# EAGLE board CT_schematic (EAGLE 7.6.0)

Size 100 x 80 mm. Coordinates in mm from the lower left corner, seen from the top.
Outline: 0,0 100,0 100,80 0,80 0,0
Copper layers (1*16): Top 0.035mm / dielectric 1.5mm / Bottom 0.035mm
Design rules "default": minimum track width 10mil, minimum drill 24mil, track to track 8mil, track to pad 8mil, pad to pad 8mil, via to via 8mil, smd to smd 8mil, copper to edge 40mil, drill to drill 8mil, minimum pad ring 10mil, minimum via ring 8mil, stop-mask expansion 4mil, vias tented up to drill 0mil, thermal gap 10mil

## Footprints (pad centres in the part's own frame; a part is rotated, then mirrored left to right if it is on the bottom)
C0603 = smd 0.8 x 0.8: 1 -0.762,0; 2 0.762,0
C0402 = smd 0.5 x 0.5: 1 -0.508,0; 2 0.508,0
C1210 = smd 1.2 x 2.5: 1 -1.524,0; 2 1.524,0
C0805 = smd 1.2 x 1.3: 1 -1.016,0; 2 1.016,0
C1206 = smd 1.3 x 1.6: 1 -1.524,0; 2 1.524,0
EXV-9H = smd 3.505 x 1.676: 1 -2.857,0; 2 2.857,0
PJ-037B_PACKAGE = drill 3.7 square: 1 12,0 | drill 3.2 square: 2 6,0
R0603 = smd 0.8 x 0.8: 1 -0.762,0; 2 0.762,0
LQFP100 = smd 0.3 x 1.2: 1 -6,-7.75; 2 -5.5,-7.75; 3 -5,-7.75; 4 -4.5,-7.75; 5 -4,-7.75; 6 -3.5,-7.75; 7 -3,-7.75; 8 -2.5,-7.75; 9 -2,-7.75; 10 -1.5,-7.75; 11 -1,-7.75; 12 -0.5,-7.75; 13 0,-7.75; 14 0.5,-7.75; 15 1,-7.75; 16 1.5,-7.75; 17 2,-7.75; 18 2.5,-7.75; 19 3,-7.75; 20 3.5,-7.75; 21 4,-7.75; 22 4.5,-7.75; 23 5,-7.75; 24 5.5,-7.75; 25 6,-7.75; 51 6,7.75; 52 5.5,7.75; 53 5,7.75; 54 4.5,7.75; 55 4,7.75; 56 3.5,7.75; 57 3,7.75; 58 2.5,7.75; 59 2,7.75; 60 1.5,7.75; 61 1,7.75; 62 0.5,7.75; 63 0,7.75; 64 -0.5,7.75; 65 -1,7.75; 66 -1.5,7.75; 67 -2,7.75; 68 -2.5,7.75; 69 -3,7.75; 70 -3.5,7.75; 71 -4,7.75; 72 -4.5,7.75; 73 -5,7.75; 74 -5.5,7.75; 75 -6,7.75 | smd 1.2 x 0.3: 26 7.75,-6; 27 7.75,-5.5; 28 7.75,-5; 29 7.75,-4.5; 30 7.75,-4; 31 7.75,-3.5; 32 7.75,-3; 33 7.75,-2.5; 34 7.75,-2; 35 7.75,-1.5; 36 7.75,-1; 37 7.75,-0.5; 38 7.75,0; 39 7.75,0.5; 40 7.75,1; 41 7.75,1.5; 42 7.75,2; 43 7.75,2.5; 44 7.75,3; 45 7.75,3.5; 46 7.75,4; 47 7.75,4.5; 48 7.75,5; 49 7.75,5.5; 50 7.75,6; 76 -7.75,6; 77 -7.75,5.5; 78 -7.75,5; 79 -7.75,4.5; 80 -7.75,4; 81 -7.75,3.5; 82 -7.75,3; 83 -7.75,2.5; 84 -7.75,2; 85 -7.75,1.5; 86 -7.75,1; 87 -7.75,0.5; 88 -7.75,0; 89 -7.75,-0.5; 90 -7.75,-1; 91 -7.75,-1.5; 92 -7.75,-2; 93 -7.75,-2.5; 94 -7.75,-3; 95 -7.75,-3.5; 96 -7.75,-4; 97 -7.75,-4.5; 98 -7.75,-5; 99 -7.75,-5.5; 100 -7.75,-6
TDFN-8/6MM = smd 0.3 x 0.75: 1 0,0; 2 0.5,0; 3 1,0; 4 1.5,0; 5 1.5,3; 6 1,3; 7 0.5,3; 8 0,3
TFBGA-153 = smd 0.3 x 0.3: A1 -3.25,3.25; A2 -2.75,3.25; A3 -2.25,3.25; A4 -1.75,3.25; A5 -1.25,3.25; A6 -0.75,3.25; A7 -0.25,3.25; A8 0.25,3.25; A9 0.75,3.25; A10 1.25,3.25; A11 1.75,3.25; A12 2.25,3.25; A13 2.75,3.25; A14 3.25,3.25; B1 -3.25,2.75; B2 -2.75,2.75; B3 -2.25,2.75; B4 -1.75,2.75; B5 -1.25,2.75; B6 -0.75,2.75; B7 -0.25,2.75; B8 0.25,2.75; B9 0.75,2.75; B10 1.25,2.75; B11 1.75,2.75; B12 2.25,2.75; B13 2.75,2.75; B14 3.25,2.75; C1 -3.25,2.25; C2 -2.75,2.25; C3 -2.25,2.25; C4 -1.75,2.25; C5 -1.25,2.25; C6 -0.75,2.25; C7 -0.25,2.25; C8 0.25,2.25; C9 0.75,2.25; C10 1.25,2.25; C11 1.75,2.25; C12 2.25,2.25; C13 2.75,2.25; C14 3.25,2.25; D1 -3.25,1.75; D2 -2.75,1.75; D3 -2.25,1.75; D4 -1.75,1.75; D12 2.25,1.75; D13 2.75,1.75; D14 3.25,1.75; E1 -3.25,1.25; E2 -2.75,1.25; E3 -2.25,1.25; E5 -1.25,1.25; E6 -0.75,1.25; E7 -0.25,1.25; E8 0.25,1.25; E9 0.75,1.25; E10 1.25,1.25; E12 2.25,1.25; E13 2.75,1.25; E14 3.25,1.25; F1 -3.25,0.75; F2 -2.75,0.75; F3 -2.25,0.75; F5 -1.25,0.75; F10 1.25,0.75; F12 2.25,0.75; F13 2.75,0.75; F14 3.25,0.75; G1 -3.25,0.25; G2 -2.75,0.25; G3 -2.25,0.25; G5 -1.25,0.25; G10 1.25,0.25; G12 2.25,0.25; G13 2.75,0.25; G14 3.25,0.25; H1 -3.25,-0.25; H2 -2.75,-0.25; H3 -2.25,-0.25; H5 -1.25,-0.25; H10 1.25,-0.25; H12 2.25,-0.25; H13 2.75,-0.25; H14 3.25,-0.25; J1 -3.25,-0.75; J2 -2.75,-0.75; J3 -2.25,-0.75; J5 -1.25,-0.75; J10 1.25,-0.75; J12 2.25,-0.75; J13 2.75,-0.75; J14 3.25,-0.75; K1 -3.25,-1.25; K2 -2.75,-1.25; K3 -2.25,-1.25; K5 -1.25,-1.25; K6 -0.75,-1.25; K7 -0.25,-1.25; K8 0.25,-1.25; K9 0.75,-1.25; K10 1.25,-1.25; K12 2.25,-1.25; K13 2.75,-1.25; K14 3.25,-1.25; L1 -3.25,-1.75; L2 -2.75,-1.75; L3 -2.25,-1.75; L12 2.25,-1.75; L13 2.75,-1.75; L14 3.25,-1.75; M1 -3.25,-2.25; M2 -2.75,-2.25; M3 -2.25,-2.25; M4 -1.75,-2.25; M5 -1.25,-2.25; M6 -0.75,-2.25; M7 -0.25,-2.25; M8 0.25,-2.25; M9 0.75,-2.25; M10 1.25,-2.25; M11 1.75,-2.25; M12 2.25,-2.25; M13 2.75,-2.25; M14 3.25,-2.25; N1 -3.25,-2.75; N2 -2.75,-2.75; N3 -2.25,-2.75; N4 -1.75,-2.75; N5 -1.25,-2.75; N6 -0.75,-2.75; N7 -0.25,-2.75; N8 0.25,-2.75; N9 0.75,-2.75; N10 1.25,-2.75; N11 1.75,-2.75; N12 2.25,-2.75; N13 2.75,-2.75; N14 3.25,-2.75; P1 -3.25,-3.25; P2 -2.75,-3.25; P3 -2.25,-3.25; P4 -1.75,-3.25; P5 -1.25,-3.25; P6 -0.75,-3.25; P7 -0.25,-3.25; P8 0.25,-3.25; P9 0.75,-3.25; P10 1.25,-3.25; P11 1.75,-3.25; P12 2.25,-3.25; P13 2.75,-3.25; P14 3.25,-3.25
SOIC-8 = smd 1.6 x 0.6: 1 -2.7,1.905 | smd 1.55 x 0.6: 2 -2.7,0.635; 3 -2.7,-0.635; 4 -2.7,-1.905; 5 2.7,-1.905; 6 2.7,-0.635; 7 2.7,0.635; 8 2.7,1.905
182-009-MALE = drill 1.194 pad 1.524 octagon: 1 -5.537,10.923; 2 -2.769,10.923; 3 0,10.923; 4 2.769,10.923; 5 5.537,10.923; 6 -4.153,8.08; 7 -1.384,8.08; 8 1.384,8.08; 9 4.153,8.08 | hole 3.048: -12.446,9.501; 12.446,9.501
WFDN-8 = smd 0.48 x 0.7: 1 0,0; 2 1.27,0; 3 2.54,0; 4 3.81,0; 5 3.81,4.45; 6 2.54,4.45; 7 1.27,4.45; 8 0,4.45 | smd 4 x 3: 9 1.89,2.25
SSOP-28 = smd 1.5 x 0.4: 1 -3.625,4.225; 2 -3.625,3.575; 3 -3.625,2.925; 4 -3.625,2.275; 5 -3.625,1.625; 6 -3.625,0.975; 7 -3.625,0.325; 8 -3.625,-0.325; 9 -3.625,-0.975; 10 -3.625,-1.625; 11 -3.625,-2.275; 12 -3.625,-2.925; 13 -3.625,-3.575; 14 -3.625,-4.225; 15 3.625,-4.225; 16 3.625,-3.575; 17 3.625,-2.925; 18 3.625,-2.275; 19 3.625,-1.625; 20 3.625,-0.975; 21 3.625,-0.325; 22 3.625,0.325; 23 3.625,0.975; 24 3.625,1.625; 25 3.625,2.275; 26 3.625,2.925; 27 3.625,3.575; 28 3.625,4.225
HTSS-105-01-G-D = drill 1 pad 1.8 square: 1 0,0 | drill 1 pad 1.8: 2 0,2.54; 3 2.54,0; 4 2.54,2.54; 5 5.08,0; 6 5.08,2.54; 7 7.62,0; 8 7.62,2.54; 9 10.16,0; 10 10.16,2.54
QFN-28 = smd 0.813 x 0.305: 1 -2.451,1.5; 2 -2.451,1; 3 -2.451,0.5; 4 -2.451,0; 5 -2.451,-0.5; 6 -2.451,-1; 7 -2.451,-1.5; 15 2.451,-1.5; 16 2.451,-1; 17 2.451,-0.5; 18 2.451,0; 19 2.451,0.5; 20 2.451,1; 21 2.451,1.5 | smd 0.305 x 0.813: 8 -1.5,-2.451; 9 -1,-2.451; 10 -0.5,-2.451; 11 0,-2.451; 12 0.5,-2.451; 13 1,-2.451; 14 1.5,-2.451; 22 1.5,2.451; 23 1,2.451; 24 0.5,2.451; 25 0,2.451; 26 -0.5,2.451; 27 -1,2.451; 28 -1.5,2.451 | smd 3.607 x 3.607: 29 0,0
SJ-43515TS-SMT-TR = smd 2.2 x 3: 1 0.6,-7.4; 4 3.4,-7.4 | smd 3 x 3: 2 12.8,-7.4; 5 17,-3 | smd 2 x 3: 3 5.3,0; 6 2.5,0 | drill 1.8: P$7 4.5,-3.69; P$8 11.54,-3.69
ABS07-32.768KHZ-7-T = smd 1.1 x 2.4: 1 -2.5,0; 2 0,0
ABLS-25.000MHZ-B2F-T = smd 5.6 x 2.8: 1 -3.81,0; 2 5.69,0
ABLS-12.288MHZ-B4-T = smd 5.6 x 2.8: 1 -3.81,0; 2 5.69,0
WSON-8 = smd 0.3 x 0.6: 1 -0.75,0; 2 0.05,0; 3 0.85,0; 4 1.65,0; 5 1.65,3.8; 6 0.85,3.8; 7 0.05,3.8; 8 -0.75,3.8 | smd 3 x 2.6: PAD 0.45,1.9
SON-6 = smd 0.55 x 0.3: 1 -0.355,0.5 | smd 0.52 x 0.3: 2 -0.37,0; 3 -0.37,-0.5; 4 0.37,-0.5; 5 0.37,0; 6 0.37,0.5
SW_4-1437565-2 = smd 1.4 x 2.1: 1 -2.23,4.55; 2 -2.23,-4.55; 3 2.23,4.55; 4 2.23,-4.55
LGM67K-G1J2-24-Z = smd 0.8 x 1.4: A -2,0; C 0,0
NC7SZ125M5X = smd 1.3 x 0.7: 1 -1.3,0.95; 2 -1.3,0; 3 -1.3,-0.95; 4 1.3,-0.95; 5 1.3,0.95

## Placement (x,y rotation side)
C1  1e-06  [C0603]  -69.85,85.09 0 top  (outside the outline)
C2  1e-07  [C0603]  -73.66,85.09 0 top  (outside the outline)
C3  1e-07  [C0603]  -77.47,85.09 0 top  (outside the outline)
C4  1e-07  [C0603]  -81.28,85.09 0 top  (outside the outline)
C5  1e-07  [C0603]  -85.09,85.09 0 top  (outside the outline)
C6  1e-07  [C0603]  -88.9,85.09 0 top  (outside the outline)
C7  1e-07  [C0603]  -15.24,90.17 0 top  (outside the outline)
C8  4.7e-06  [C0603]  -54.61,85.09 0 top  (outside the outline)
C9  1e-08  [C0603]  -19.05,90.17 0 top  (outside the outline)
C10  1e-06  [C0603]  -22.86,90.17 0 top  (outside the outline)
C11  1e-11  [C0402]  -73.66,90.17 0 top  (outside the outline)
C12  1e-11  [C0402]  -77.47,90.17 0 top  (outside the outline)
C13  1e-11  [C0402]  -81.28,90.17 0 top  (outside the outline)
C14  1e-11  [C0402]  -85.09,90.17 0 top  (outside the outline)
C15  1e-08  [C0402]  -88.9,90.17 0 top  (outside the outline)
C16  1e-07  [C0402]  -15.24,95.25 0 top  (outside the outline)
C17  2.2e-06  [C0603]  -58.42,85.09 0 top  (outside the outline)
C18  2.2e-06  [C0603]  -62.23,85.09 0 top  (outside the outline)
C19  1e-07  [C0402]  -19.05,95.25 0 top  (outside the outline)
C20  1e-07  [C0402]  -22.86,95.25 0 top  (outside the outline)
C21  2.2e-06  [C0603]  -66.04,85.09 0 top  (outside the outline)
C22  1e-07  [C0402]  -26.67,95.25 0 top  (outside the outline)
C23  1e-07  [C0402]  -30.48,95.25 0 top  (outside the outline)
C24  1e-07  [C0402]  -34.29,95.25 0 top  (outside the outline)
C25  1e-07  [C0402]  -38.1,95.25 0 top  (outside the outline)
C26  1e-07  [C0402]  -41.91,95.25 0 top  (outside the outline)
C27  1e-07  [C0402]  -45.72,95.25 0 top  (outside the outline)
C28  1e-07  [C0402]  -49.53,95.25 0 top  (outside the outline)
C29  2.2e-05  [C1210]  -24.13,73.66 0 top  (outside the outline)
C30  2.2e-05  [C1210]  -30.48,73.66 0 top  (outside the outline)
C31  1e-09  [C0402]  -53.34,95.25 0 top  (outside the outline)
C32  1e-09  [C0402]  -57.15,95.25 0 top  (outside the outline)
C33  1e-07  [C0402]  -60.96,95.25 0 top  (outside the outline)
C34  1e-07  [C0402]  -64.77,95.25 0 top  (outside the outline)
C35  1e-07  [C0402]  -68.58,95.25 0 top  (outside the outline)
C36  1e-07  [C0402]  -72.39,95.25 0 top  (outside the outline)
C37  1e-07  [C0402]  -76.2,95.25 0 top  (outside the outline)
C38  1e-05  [C0805]  -60.96,73.66 0 top  (outside the outline)
C39  1e-05  [C0805]  -66.04,73.66 0 top  (outside the outline)
C40  1e-05  [C0805]  -71.12,73.66 0 top  (outside the outline)
C41  1e-05  [C0805]  -76.2,73.66 0 top  (outside the outline)
C42  1e-05  [C0805]  -81.28,73.66 0 top  (outside the outline)
C43  2.2e-11  [C0402]  -66.04,90.17 0 top  (outside the outline)
C44  2.2e-11  [C0402]  -69.85,90.17 0 top  (outside the outline)
C45  1e-08  [C0402]  -80.01,95.25 0 top  (outside the outline)
C46  1e-05  [C1206]  -43.18,73.66 0 top  (outside the outline)
C47  1e-05  [C1210]  -36.83,73.66 0 top  (outside the outline)
C48  1e-07  [C0402]  -83.82,95.25 0 top  (outside the outline)
C49  0.0001  [EXV-9H]  -66.04,57.15 0 top  (outside the outline)
C50  0.0001  [EXV-9H]  -77.47,57.15 0 top  (outside the outline)
C51  1e-08  [C0402]  -87.63,95.25 0 top  (outside the outline)
C52  1e-08  [C0402]  -15.24,100.33 0 top  (outside the outline)
J1  PJ-037B  [PJ-037B_PACKAGE]  -27.94,45.72 0 top  (outside the outline)
R2  1000.0  [R0603]  -26.67,90.17 0 top  (outside the outline)
R4  4700.0  [R0603]  -30.48,90.17 0 top  (outside the outline)
R5  4700.0  [R0603]  -34.29,90.17 0 top  (outside the outline)
R6  2200.0  [R0603]  -38.1,90.17 0 top  (outside the outline)
R7  2200.0  [R0603]  -41.91,90.17 0 top  (outside the outline)
R8  10000.0  [R0603]  -50.8,80.01 0 top  (outside the outline)
R9  34000.0  [R0603]  -55.88,80.01 0 top  (outside the outline)
R10  34000.0  [R0603]  -60.96,80.01 0 top  (outside the outline)
R11  34000.0  [R0603]  -66.04,80.01 0 top  (outside the outline)
R12  34000.0  [R0603]  -71.12,80.01 0 top  (outside the outline)
R13  34000.0  [R0603]  -76.2,80.01 0 top  (outside the outline)
R14  34000.0  [R0603]  -81.28,80.01 0 top  (outside the outline)
R15  34000.0  [R0603]  -86.36,80.01 0 top  (outside the outline)
R16  34000.0  [R0603]  -15.24,85.09 0 top  (outside the outline)
R17  34000.0  [R0603]  -20.32,85.09 0 top  (outside the outline)
R18  34000.0  [R0603]  -25.4,85.09 0 top  (outside the outline)
R19  120.0  [R0603]  -45.72,90.17 0 top  (outside the outline)
R20  100000.0  [R0603]  -86.36,73.66 0 top  (outside the outline)
R21  100000.0  [R0603]  -15.24,80.01 0 top  (outside the outline)
R22  100000.0  [R0603]  -20.32,80.01 0 top  (outside the outline)
R23  100000.0  [R0603]  -25.4,80.01 0 top  (outside the outline)
R24  100000.0  [R0603]  -30.48,80.01 0 top  (outside the outline)
R25  47000.0  [R0603]  -30.48,85.09 0 top  (outside the outline)
R26  47000.0  [R0603]  -35.56,85.09 0 top  (outside the outline)
R27  47000.0  [R0603]  -40.64,85.09 0 top  (outside the outline)
R28  680.0  [R0603]  -49.53,90.17 0 top  (outside the outline)
R29  100000.0  [R0603]  -35.56,80.01 0 top  (outside the outline)
R30  2231.0  [R0603]  -53.34,90.17 0 top  (outside the outline)
R31  1000.0  [R0603]  -57.15,90.17 0 top  (outside the outline)
R32  10000.0  [R0603]  -45.72,85.09 0 top  (outside the outline)
R33  10000.0  [R0603]  -50.8,85.09 0 top  (outside the outline)
R34  9100.0  [R0603]  -60.96,90.17 0 top  (outside the outline)
R35  680000.0  [R0603]  -40.64,80.01 0 top  (outside the outline)
R36  120000.0  [R0603]  -45.72,80.01 0 top  (outside the outline)
U1  STM32L471VET6  [LQFP100]  -77.47,8.89 0 top  (outside the outline)
U2  24AA00T-I/MNY  [TDFN-8/6MM]  -24.13,57.15 0 top  (outside the outline)
U3  mtfc4gmcdm  [TFBGA-153]  -59.69,8.89 0 top  (outside the outline)
U4  SN65HVD230D  [SOIC-8]  -36.83,57.15 0 top  (outside the outline)
U5  182-009-113R531  [182-009-MALE]  -36.83,6.35 0 top  (outside the outline)
U6  SST26VF032B-104I/MF  [WFDN-8]  -67.31,41.91 0 top  (outside the outline)
U7  ST3241EBPR  [SSOP-28]  -19.05,30.48 0 top  (outside the outline)
U8  HTSS-105-01-G-D  [HTSS-105-01-G-D]  -83.82,41.91 0 top  (outside the outline)
U9  WM8731CLSEFL  [QFN-28]  -16.51,74.93 0 top  (outside the outline)
U10  SJ-43515TS-SMT-TR  [SJ-43515TS-SMT-TR]  -50.8,31.75 0 top  (outside the outline)
U11  SJ-43515TS-SMT-TR  [SJ-43515TS-SMT-TR]  -78.74,31.75 0 top  (outside the outline)
U12  ABS07-32.768KHZ-7-T  [ABS07-32.768KHZ-7-T]  -69.85,67.31 0 top  (outside the outline)
U13  ABLS-25.000MHZ-B2F-T  [ABLS-25.000MHZ-B2F-T]  -26.67,67.31 0 top  (outside the outline)
U14  ABLS-12.288MHZ-B4-T  [ABLS-12.288MHZ-B4-T]  -46.99,67.31 0 top  (outside the outline)
U15  LP3878SDX-ADJ/NOPB  [WSON-8]  -58.42,55.88 0 top  (outside the outline)
U16  TPS3895ADRYR  [SON-6]  -17.78,99.06 0 top  (outside the outline)
U17  4-1437565-2  [SW_4-1437565-2]  -44.45,44.45 0 top  (outside the outline)
U18  Q65110A2395  [LGM67K-G1J2-24-Z]  -78.74,66.04 0 top  (outside the outline)
U19  nc7sz125m5x  [NC7SZ125M5X]  -48.26,73.66 0 top  (outside the outline)
U20  nc7sz125m5x  [NC7SZ125M5X]  -54.61,73.66 0 top  (outside the outline)

## Library data of the parts
C1-C52 J1 R2 R4-R36 U1-U20 = circuit_tree

## Nets
CLK_CRYSTAL_U1_8: C11.1 U1.8 U12.1
CLK_CRYSTAL_U1_9: C12.1 U1.9 U12.2
CLK_CRYSTAL_U1_12: C13.1 U1.12 U13.1
CLK_CRYSTAL_U1_13: C14.1 U1.13 U13.2
CLK_CRYSTAL_U9_1: C43.1 U9.1 U14.1
CLK_CRYSTAL_U9_2: C44.1 U9.2 U14.2
GND: C1.2 C2.2 C3.2 C4.2 C5.2 C6.2 C7.2 C8.2 C9.2 C10.2 C11.2 C12.2 C13.2 C14.2 C15.2 C16.2 C17.2 C18.2 C19.2 C20.2 C21.2 C22.2 C23.2 C24.2 C27.2 C28.2 C32.2 C33.2 C34.2 C35.2 C36.2 C37.2 C38.2 C39.2 C40.2 C41.2 C42.2 C43.2 C44.2 C45.2 C46.2 C47.2 C48.2 C49.2 C50.2 C51.2 C52.2 J1.2 R2.2 R8.2 R20.2 R25.2 R26.2 R27.2 R31.2 R34.2 R36.2 U1.10 U1.19 U1.20 U1.27 U1.49 U1.74 U1.99 U2.4 U3.C4 U3.E7 U3.G5 U3.H10 U3.K8 U3.N2 U3.N5 U3.P4 U3.P6 U4.2 U5.5 U6.4 U6.9 U7.23 U7.25 U8.9 U9.4 U9.15 U9.19 U9.25 U9.26 U9.29 U10.1 U11.1 U15.3 U15.PAD U16.2 U18.C U19.1 U19.3 U20.1 U20.3
NET_U1_14: R5.1 U1.14 U20.4
NET_U1_92: R6.1 U1.92 U2.6
NET_U1_93: R7.1 U1.93 U2.5
NET_U1_94: R8.1 U1.94
NET_U1_97: U18.A
NET_U1_98: U17.3 U17.4
NET_U3_C2: C18.1 C19.1 U3.C2
NET_U3_K5: R4.1 U3.K5 U19.4
NET_U4_6: R19.2 U4.6
NET_U4_8: R20.1 U4.8
NET_U5_2: R19.2 U4.6 U5.2
NET_U5_3: R19.1 U4.7 U5.3
NET_U7_1: C26.1 U7.1
NET_U7_2: C26.2 U7.2
NET_U7_3: C28.1 U7.3
NET_U7_22: R24.1 U7.22
NET_U7_24: C25.2 U7.24
NET_U7_27: C27.1 U7.27
NET_U7_28: C25.1 U7.28
NET_U8_3: U7.4 U8.3
NET_U8_4: U7.5 U8.4
NET_U8_5: U7.9 U8.5
NET_U8_6: U7.10 U8.6
NET_U9_9: U9.9
NET_U9_20: C37.1 C42.1 U9.20
NET_U10_2: C30.1 R26.1 U10.2
NET_U10_5: C29.1 R25.1 U10.5
NET_U10_13: C29.2
NET_U10_14: C30.2
NET_U11_5: C31.1 C32.1 R27.1 R28.1 U11.5
NET_U11_21: R28.2
NET_U11_22: C31.2
NET_U15_1: C45.1 U15.1
NET_U15_6: R30.2 R31.1 U15.6
NET_U15_8: R29.1 U15.8
NET_U16_1: R33.1 R34.1 U16.1
NET_U16_3: R35.2 R36.1 U16.3
NET_U16_4: R32.1 U16.4 U19.2 U20.2
NET_U17_1: R2.1 U17.1 U17.2
PROC_CAN1_RX: U1.70 U4.4
PROC_CAN1_TX: U1.71 U4.1
PROC_LPUART1_CTS: U1.52 U7.13
PROC_LPUART1_RTS: U1.51 U7.18
PROC_LPUART1_RX: U1.15 U7.19
PROC_LPUART1_TX: U1.16 U7.14
PROC_QUADSPI_BK1_IO0: U1.36 U6.5
PROC_QUADSPI_BK1_IO1: U1.35 U6.2
PROC_QUADSPI_BK1_IO2: R22.1 U1.32 U6.3
PROC_QUADSPI_BK1_IO3: R23.1 U1.31 U6.7
PROC_QUADSPI_CLK: U1.41 U6.6
PROC_QUADSPI_NCS: R21.1 U1.42 U6.1
PROC_SAI1_FS_A: U1.3 U9.9 U9.11
PROC_SAI1_SCK_A: U1.4 U9.7
PROC_SAI1_SD_A: U1.5 U9.8
PROC_SDMMC1_CK: R18.1 U1.80 U3.M6
PROC_SDMMC1_CMD: R17.1 U1.83 U3.M5
PROC_SDMMC1_D0: R9.1 U1.65 U3.A3
PROC_SDMMC1_D1: R10.1 U1.66 U3.A4
PROC_SDMMC1_D2: R11.1 U1.78 U3.A5
PROC_SDMMC1_D3: R12.1 U1.79 U3.B2
PROC_SDMMC1_D4: R13.1 U1.95 U3.B3
PROC_SDMMC1_D5: R14.1 U1.96 U3.B4
PROC_SDMMC1_D6: R15.1 U1.63 U3.B5
PROC_SDMMC1_D7: R16.1 U1.64 U3.B6
VCC_S1_9V4: C46.1 C49.1 C50.1 J1.1 R29.2 U15.4
VCC_TIER1_3V3: C1.1 C2.1 C3.1 C4.1 C5.1 C6.1 C7.1 C8.1 C9.1 C10.1 C15.1 C16.1 C17.1 C20.1 C21.1 C22.1 C23.1 C24.1 C33.1 C34.1 C35.1 C36.1 C38.1 C39.1 C40.1 C41.1 C47.1 C48.1 C51.1 C52.1 R4.2 R5.2 R6.2 R7.2 R9.2 R10.2 R11.2 R12.2 R13.2 R14.2 R15.2 R16.2 R17.2 R18.2 R21.2 R22.2 R23.2 R24.2 R30.1 R32.2 R33.2 R35.1 U1.6 U1.11 U1.21 U1.22 U1.28 U1.50 U1.73 U1.75 U1.100 U2.8 U3.C6 U3.E6 U3.F5 U3.J10 U3.K9 U3.M4 U3.N4 U3.P3 U3.P5 U4.3 U6.8 U7.26 U9.3 U9.5 U9.12 U9.18 U15.5 U16.6 U19.5 U20.5

## Tracks (layer width: path | path; a pad name or v marks a point on that pad's centre or on a via)
CLK_CRYSTAL_U1_8  (2 unrouted)
CLK_CRYSTAL_U1_9  (2 unrouted)
CLK_CRYSTAL_U1_12  (2 unrouted)
CLK_CRYSTAL_U1_13  (2 unrouted)
CLK_CRYSTAL_U9_1  (2 unrouted)
CLK_CRYSTAL_U9_2  (2 unrouted)
GND  (96 unrouted)
NET_U1_14  (2 unrouted)
NET_U1_92  (2 unrouted)
NET_U1_93  (2 unrouted)
NET_U1_94  (1 unrouted)
NET_U1_98  (1 unrouted)
NET_U3_C2  (2 unrouted)
NET_U3_K5  (2 unrouted)
NET_U4_6  (1 unrouted)
NET_U4_8  (1 unrouted)
NET_U5_2  (2 unrouted)
NET_U5_3  (2 unrouted)
NET_U7_1  (1 unrouted)
NET_U7_2  (1 unrouted)
NET_U7_3  (1 unrouted)
NET_U7_22  (1 unrouted)
NET_U7_24  (1 unrouted)
NET_U7_27  (1 unrouted)
NET_U7_28  (1 unrouted)
NET_U8_3  (1 unrouted)
NET_U8_4  (1 unrouted)
NET_U8_5  (1 unrouted)
NET_U8_6  (1 unrouted)
NET_U9_20  (2 unrouted)
NET_U10_2  (2 unrouted)
NET_U10_5  (2 unrouted)
NET_U11_5  (4 unrouted)
NET_U15_1  (1 unrouted)
NET_U15_6  (2 unrouted)
NET_U15_8  (1 unrouted)
NET_U16_1  (2 unrouted)
NET_U16_3  (2 unrouted)
NET_U16_4  (3 unrouted)
NET_U17_1  (2 unrouted)
PROC_CAN1_RX  (1 unrouted)
PROC_CAN1_TX  (1 unrouted)
PROC_LPUART1_CTS  (1 unrouted)
PROC_LPUART1_RTS  (1 unrouted)
PROC_LPUART1_RX  (1 unrouted)
PROC_LPUART1_TX  (1 unrouted)
PROC_QUADSPI_BK1_IO0  (1 unrouted)
PROC_QUADSPI_BK1_IO1  (1 unrouted)
PROC_QUADSPI_BK1_IO2  (2 unrouted)
PROC_QUADSPI_BK1_IO3  (2 unrouted)
PROC_QUADSPI_CLK  (1 unrouted)
PROC_QUADSPI_NCS  (2 unrouted)
PROC_SAI1_FS_A  (2 unrouted)
PROC_SAI1_SCK_A  (1 unrouted)
PROC_SAI1_SD_A  (1 unrouted)
PROC_SDMMC1_CK  (2 unrouted)
PROC_SDMMC1_CMD  (2 unrouted)
PROC_SDMMC1_D0  (2 unrouted)
PROC_SDMMC1_D1  (2 unrouted)
PROC_SDMMC1_D2  (2 unrouted)
PROC_SDMMC1_D3  (2 unrouted)
PROC_SDMMC1_D4  (2 unrouted)
PROC_SDMMC1_D5  (2 unrouted)
PROC_SDMMC1_D6  (2 unrouted)
PROC_SDMMC1_D7  (2 unrouted)
VCC_S1_9V4  (5 unrouted)
VCC_TIER1_3V3  (81 unrouted)